# EAGLE board BothSensorBoards (EAGLE 6.6.0)
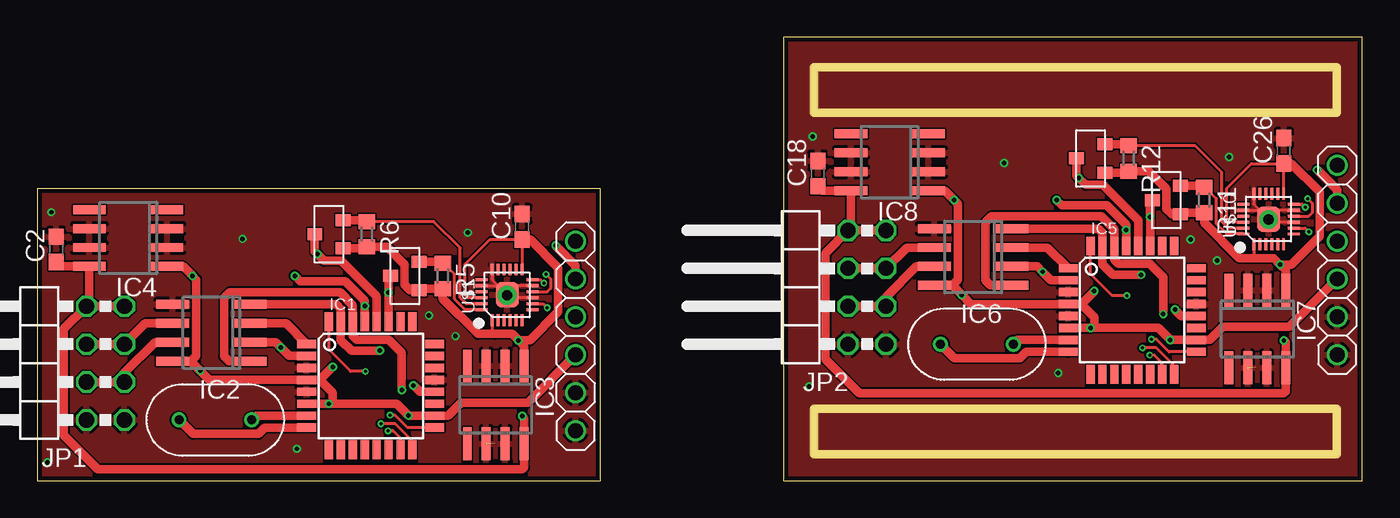
[diagram p0: board, top side]
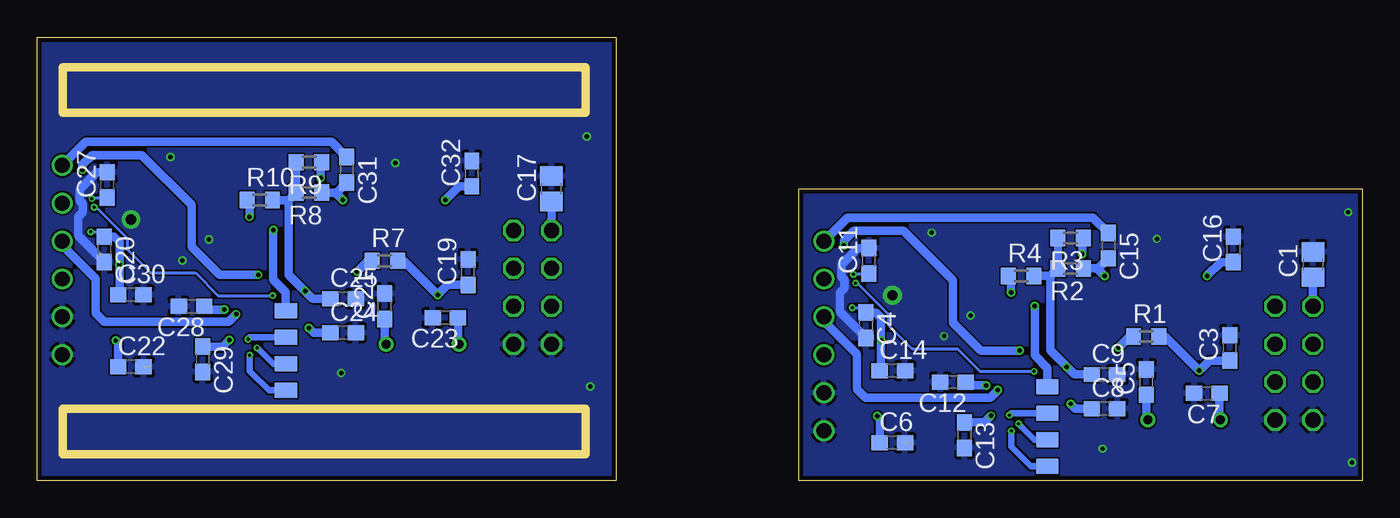
[diagram p1: board, bottom side, seen from below]

Size 88.82 x 29.71 mm. Coordinates in mm from the lower left corner, seen from the top.
Outline: 0,0 37.77,0 37.77,19.55 0,19.55 0,0
Outline: 50.04,0 88.82,0 88.82,29.71 50.04,29.71 50.04,0
Copper layers (1*16): Top 0.035mm / dielectric 1.5mm / Bottom 0.035mm
Design rules "PCB-POOL HighSpec": minimum track width 0.125mm, minimum drill 0.2mm, track to track 0.125mm, track to pad 0.125mm, pad to pad 0.125mm, via to via 0.125mm, smd to smd 0.125mm, copper to edge 0.3mm, drill to drill 0.2mm, minimum pad ring 0.2mm, minimum via ring 0.125mm, stop-mask expansion 0.075mm, vias tented up to drill 0mil, thermal gap 0.2mm
Milling: area 52.1,24.6 to 87.1,27.7; area 52.1,1.8 to 87.1,4.8

## Footprints (pad centres in the part's own frame; a part is rotated, then mirrored left to right if it is on the bottom)
C0805 = smd 1.3 x 1.5: 1 -0.85,0; 2 0.85,0
C0603 = smd 1.1 x 1: 1 -0.85,0; 2 0.85,0
TQFP32-08 = smd 1.27 x 0.559: 1 -4.293,2.8; 2 -4.293,2; 3 -4.293,1.2; 4 -4.293,0.4; 5 -4.293,-0.4; 6 -4.293,-1.2; 7 -4.293,-2; 8 -4.293,-2.8; 17 4.293,-2.8; 18 4.293,-2; 19 4.293,-1.2; 20 4.293,-0.4; 21 4.293,0.4; 22 4.293,1.2; 23 4.293,2; 24 4.293,2.8 | smd 0.559 x 1.27: 9 -2.8,-4.293; 10 -2,-4.293; 11 -1.2,-4.293; 12 -0.4,-4.293; 13 0.4,-4.293; 14 1.2,-4.293; 15 2,-4.293; 16 2.8,-4.293; 25 2.8,4.293; 26 2,4.293; 27 1.2,4.293; 28 0.4,4.293; 29 -0.4,4.293; 30 -1.2,4.293; 31 -2,4.293; 32 -2.8,4.293
SO-08 = smd 0.6 x 2.2: 1 -1.905,-2.6; 2 -0.635,-2.6; 3 0.635,-2.6; 4 1.905,-2.6; 5 1.905,2.6; 6 0.635,2.6; 7 -0.635,2.6; 8 -1.905,2.6
SO08 = smd 0.6 x 2.2: 1 -1.905,-2.6; 2 -0.635,-2.6; 3 0.635,-2.6; 4 1.905,-2.6; 5 1.905,2.6; 6 0.635,2.6; 7 -0.635,2.6; 8 -1.905,2.6
2X04/90 = drill 1.016 octagon: 1 -3.81,-6.35; 2 -3.81,-3.81; 3 -1.27,-6.35; 4 -1.27,-3.81; 5 1.27,-6.35; 6 1.27,-3.81; 7 3.81,-6.35; 8 3.81,-3.81
R0603 = smd 1 x 1.1: 1 -0.85,0; 2 0.85,0
LEAD-QFN24 = smd 0.8 x 0.2: 1 -1.7,1; 2 -1.7,0.6; 3 -1.7,0.2; 4 -1.7,-0.2; 5 -1.7,-0.6; 6 -1.7,-1; 13 1.7,-1; 14 1.7,-0.6; 15 1.7,-0.2; 16 1.7,0.2; 17 1.7,0.6; 18 1.7,1 | smd 0.2 x 0.8: 7 -1,-1.7; 8 -0.6,-1.7; 9 -0.2,-1.7; 10 0.2,-1.7; 11 0.6,-1.7; 12 1,-1.7; 19 1,1.7; 20 0.6,1.7; 21 0.2,1.7; 22 -0.2,1.7; 23 -0.6,1.7; 24 -1,1.7 | smd 1.7 x 1.54: 25 0,0
SOT-23-3 = smd 0.8 x 1: P$1 -0.95,-0.95; P$2 0.95,-0.95; P$3 0,0.95
LFXTAL003240BULK = drill 0.6: P$1 -2.44,0; P$2 2.44,0
FTDI-PINHEADER = drill 1: P$1 0,-6.35; P$2 0,-3.81; P$3 0,-1.27; P$4 0,1.27; P$5 0,3.81; P$6 0,6.35
ISP_PADS = smd 1 x 1.5: P$1 0.889,-1.143; P$2 -0.889,-1.143; P$3 -2.667,-1.143; P$4 -4.445,-1.143

## Placement (x,y rotation side)
C1  10u  [C0805]  3.3,14.48 90 bottom
C2  330n  [C0603]  1.27,15.49 90 top
C3  100n  [C0603]  8.89,8.89 90 bottom
C4  10n  [C0603]  33.27,10.41 270 bottom
C5  56p  [C0603]  14.48,6.6 90 bottom
C6  330n  [C0603]  31.5,2.54 0 bottom
C7  56p  [C0603]  10.41,5.84 180 bottom
C8  100n  [C0603]  17.27,4.83 0 bottom
C9  100n  [C0603]  17.27,7.11 0 bottom
C10  100n  [C0603]  32.51,17.02 90 top
C11  100n  [C0603]  33.07,14.73 90 bottom
C12  100n  [C0603]  27.43,6.6 180 bottom
C13  100n  [C0603]  26.67,3.05 270 bottom
C14  100n  [C0603]  31.5,7.37 0 bottom
C15  100n  [C0603]  17.02,15.75 270 bottom
C16  100n  [C0603]  8.64,15.49 90 bottom
C17  10u  [C0805]  54.36,19.56 90 bottom
C18  330n  [C0603]  52.32,20.57 90 top
C19  100n  [C0603]  59.94,13.97 90 bottom
C20  10n  [C0603]  84.33,15.49 270 bottom
C21  56p  [C0603]  65.53,11.68 90 bottom
C22  330n  [C0603]  82.55,7.62 0 bottom
C23  56p  [C0603]  61.47,10.92 180 bottom
C24  100n  [C0603]  68.33,9.91 0 bottom
C25  100n  [C0603]  68.33,12.19 0 bottom
C26  100n  [C0603]  83.57,22.1 90 top
C27  100n  [C0603]  84.12,19.81 90 bottom
C28  100n  [C0603]  78.49,11.68 180 bottom
C29  100n  [C0603]  77.72,8.13 270 bottom
C30  100n  [C0603]  82.55,12.45 0 bottom
C31  100n  [C0603]  68.07,20.83 270 bottom
C32  100n  [C0603]  59.69,20.57 90 bottom
IC1  MEGA8-AI  [TQFP32-08]  22.35,6.35 0 top
IC2  SN65176D  [SO-08]  11.68,9.91 90 top
IC3  LM2936M-3.3  [SO08]  30.73,5.08 180 top
IC4  LM2936M-5.0  [SO08]  6.1,16.26 90 top
IC5  MEGA8-AI  [TQFP32-08]  73.41,11.43 0 top
IC6  SN65176D  [SO-08]  62.74,14.99 90 top
IC7  LM2936M-3.3  [SO08]  81.79,10.16 180 top
IC8  LM2936M-5.0  [SO08]  57.15,21.34 90 top
JP1  [2X04/90]  -0.51,7.87 90 top
JP2  [2X04/90]  50.55,12.95 90 top
R1  10k  [R0603]  14.48,9.65 0 bottom
R2  10k  [R0603]  19.56,14.22 180 bottom
R3  10k  [R0603]  19.56,16.26 180 bottom
R4  10k  [R0603]  22.86,13.72 0 bottom
R5  10k  [R0603]  27.18,13.72 270 top
R6  10k  [R0603]  22.1,16.51 270 top
R7  10k  [R0603]  65.53,14.73 0 bottom
R8  10k  [R0603]  70.61,19.3 180 bottom
R9  10k  [R0603]  70.61,21.34 180 bottom
R10  10k  [R0603]  73.91,18.8 0 bottom
R11  10k  [R0603]  78.23,18.8 270 top
R12  10k  [R0603]  73.15,21.59 270 top
U$1  MPU-9250  [LEAD-QFN24]  31.5,12.45 90 top
U$2  2N7002E  [SOT-23-3]  19.56,16.51 90 top
U$3  2N7002E  [SOT-23-3]  24.64,13.72 90 top
U$4  LFXTAL003240BULK  [LFXTAL003240BULK]  11.94,4.06 180 top
U$5  FTDI-PINHEADER  [FTDI-PINHEADER]  36.09,9.7 0 top
U$6  ISP_PADS  [ISP_PADS]  19.96,1.85 270 bottom
U$7  2N7002E  [SOT-23-3]  70.61,21.59 90 top
U$8  2N7002E  [SOT-23-3]  75.69,18.8 90 top
U$9  LFXTAL003240BULK  [LFXTAL003240BULK]  62.99,9.14 180 top
U$10  MPU-9250  [LEAD-QFN24]  82.55,17.53 90 top
U$11  FTDI-PINHEADER  [FTDI-PINHEADER]  87.15,14.78 0 top
U$12  ISP_PADS  [ISP_PADS]  71.02,6.93 270 bottom

## Library data of the parts
C1-C32 R1-R12 = resistor
IC1 IC5 = atmel; MPN: ATMEGA8-16AU; OC_FARNELL: 9171371; OC_NEWARK: 73M8863
IC2 IC6 = texas; MF: TEXAS INSTRUMENTS; MPN: SN65176BD; OC_FARNELL: 9589970; OC_NEWARK: 08F5891
IC3 IC7 = national-semiconductor; MF: NATIONAL SEMICONDUCTOR; MPN: LM2936M-3.3/NOPB; OC_FARNELL: 1469059; OC_NEWARK: 41K4514
IC4 IC8 = national-semiconductor; MF: NATIONAL SEMICONDUCTOR; MPN: LM2936M-5.0/NOPB; OC_FARNELL: 9494421; OC_NEWARK: 41K4515
JP1 JP2 = pinhead
U$1 U$10 = invensense
U$2 U$3 U$7 U$8 = 2N7002E
U$4 U$9 = LFXTAL003240Bulk
U$5 U$11 = FTDI-PINHEADER
U$6 U$12 = ISP_Pads

## Nets
+3V1: C20.1 C26.1 C30.1 IC7.1 R11.2 R12.2 U$7.P$1 U$8.P$1 U$10.1 U$10.8 U$10.13 U$10.22
+3V3: C4.1 C10.1 C14.1 IC3.1 R5.2 R6.2 U$1.1 U$1.8 U$1.13 U$1.22 U$2.P$1 U$3.P$1
+5V: C3.1 C8.1 C9.1 C13.1 C16.1 IC1.4 IC1.6 IC1.18 IC2.8 IC4.1 R1.2 R2.2 R3.2 R4.2 U$5.P$3
+5V1: C19.1 C24.1 C25.1 C29.1 C32.1 IC5.4 IC5.6 IC5.18 IC6.8 IC8.1 R7.2 R8.2 R9.2 R10.2 U$11.P$3
-RE: IC1.2 IC2.2 R1.1
-RE1: IC5.2 IC6.2 R7.1
/RESET: C15.2 IC1.29 R2.1 U$6.P$4
/RESET1: C31.2 IC5.29 R8.1 U$12.P$4
DE: IC1.1 IC2.3
DE1: IC5.1 IC6.3
DTR: C15.1 U$5.P$6
DTR1: C31.1 U$11.P$6
GND: C1.2 C2.2 C3.2 C4.2 C5.2 C6.2 C7.2 C8.2 C9.2 C10.2 C11.2 C12.2 C13.2 C14.2 C16.2 IC1.3 IC1.5 IC1.21 IC2.5 IC3.2 IC3.3 IC3.6 IC3.7 IC4.2 IC4.3 IC4.6 IC4.7 JP1.1 JP1.2 U$1.9 U$1.11 U$1.18 U$1.20 U$1.25 U$5.P$1 U$5.P$2
GND1: C17.2 C18.2 C19.2 C20.2 C21.2 C22.2 C23.2 C24.2 C25.2 C26.2 C27.2 C28.2 C29.2 C30.2 C32.2 IC5.3 IC5.5 IC5.21 IC6.5 IC7.2 IC7.3 IC7.6 IC7.7 IC8.2 IC8.3 IC8.6 IC8.7 JP2.1 JP2.2 U$10.9 U$10.11 U$10.18 U$10.20 U$10.25 U$11.P$1 U$11.P$2
INT: IC1.32 U$1.12
INT1: IC5.32 U$10.12
MISO: IC1.16 U$6.P$2
MISO1: IC5.16 U$12.P$2
MOSI: IC1.15 U$6.P$1
MOSI1: IC5.15 U$12.P$1
N$1: IC2.6 JP1.5 JP1.6
N$2: IC2.7 JP1.3 JP1.4
N$3: R6.1 U$1.23 U$2.P$2
N$4: C11.1 U$1.10
N$5: C5.1 IC1.7 U$4.P$1
N$6: R5.1 U$1.24 U$3.P$2
N$7: C7.1 IC1.8 U$4.P$2
N$8: R12.1 U$7.P$2 U$10.23
N$9: C12.1 IC1.20
N$10: R11.1 U$8.P$2 U$10.24
N$11: C27.1 U$10.10
N$12: C21.1 IC5.7 U$9.P$1
N$13: C23.1 IC5.8 U$9.P$2
N$14: C28.1 IC5.20
N$15: IC6.6 JP2.5 JP2.6
N$16: IC6.7 JP2.3 JP2.4
RX: IC1.30 IC2.1 U$5.P$4
RX1: IC5.30 IC6.1 U$11.P$4
SCK: IC1.17 U$6.P$3
SCK1: IC5.17 U$12.P$3
SCL: IC1.28 R3.1 U$2.P$3
SCL1: IC5.28 R9.1 U$7.P$3
SDA: IC1.27 R4.1 U$3.P$3
SDA1: IC5.27 R10.1 U$8.P$3
TX: IC1.31 IC2.4 U$5.P$5
TX1: IC5.31 IC6.4 U$11.P$5
VCC: C1.1 C2.1 C6.1 IC3.8 IC4.8 JP1.7 JP1.8
VCC1: C17.1 C18.1 C22.1 IC7.8 IC8.8 JP2.7 JP2.8

## Tracks (layer width: path | path; a pad name or v marks a point on that pad's centre or on a via)
+3V1  (via drill 0.2 pad 0.2, 0.3 pad 0.56)
  Top 0.2: 80.21,17.33 U$10.22 79.96,17.33 79.73,17.55 79.73,19.58 81.39,21.25 C26.1 83.55,21.23 U$10.13 | U$10.8 84.98,16.93 v85.24,16.66 | U$10.1 81.55,15.07 81.71,14.91
  Top 0.559: U$7.P$1 73.05,20.64 R12.2 74.51,20.74 75.69,19.56 75.69,18.2 76.05,17.85 U$8.P$1 76.74,17.95 R11.2 78.23,17.27 80.59,14.91 81.71,14.91 82.88,14.91 v83.31,14.48 | v83.31,14.48 83.69,14.1 IC7.1 | v83.31,14.48 84.07,14.48 85.98,16.38 85.98,19.36 84.09,21.25 C26.1
  Bottom 0.2: v85.24,16.66 84.65,16.66 C20.1
  Bottom 0.559: C30.1 83.31,12.53 v83.31,14.48 83.31,16 83.65,16.34 C20.1
+3V3  (via drill 0.2 pad 0.2, 0.3 pad 0.56)
  Top 0.2: 29.16,12.25 U$1.22 28.9,12.25 28.68,12.47 28.68,14.5 30.34,16.17 C10.1 32.5,16.15 U$1.13 | U$1.8 33.92,11.85 v34.19,11.58 | U$1.1 30.5,9.99 30.66,9.83
  Top 0.559: U$2.P$1 22,15.56 R6.2 23.46,15.66 24.64,14.48 24.64,13.12 24.99,12.77 U$3.P$1 25.69,12.87 R5.2 27.18,12.19 29.54,9.83 30.66,9.83 31.83,9.83 v32.26,9.4 | v32.26,9.4 32.64,9.02 IC3.1 | v32.26,9.4 33.02,9.4 34.92,11.3 34.92,14.28 33.03,16.17 C10.1
  Bottom 0.2: v34.19,11.58 33.59,11.58 C4.1
  Bottom 0.559: C14.1 32.26,7.45 v32.26,9.4 32.26,10.92 32.6,11.26 C4.1
+5V  (via drill 0.3 pad 0.56)
  Top 0.559: 10.29,8 v10.92,7.37 11.54,6.75 IC1.4 18.94,6.75 | 18.94,6.75 v19.81,7.62 | 18.94,6.75 19.81,5.88 19.81,5.33 19.63,5.15 IC1.6 v19.56,5.15 24.09,5.15 v24.89,4.35 IC1.18 27.54,4.35 28.42,5.23 32.89,5.23 U$5.P$3 | 10.29,8 10.67,8.38 10.67,13.46 v10.41,13.72 9.78,14.35 IC4.1 | 10.29,8 IC2.8
  Bottom 0.559: R4.2 20.92,13.72 | 20.92,13.72 R2.2 R3.2 | 20.92,13.72 20.92,8.72 v19.81,7.62 19.3,7.11 C9.1 | C3.1 10.25,8.04 v10.92,7.37 13.21,9.65 R1.2 | C8.1 19.23,4.83 v19.56,5.15 | C13.1 25.34,3.9 v24.89,4.35 | C16.1 9.49,14.64 v10.41,13.72
+5V1  (via drill 0.3 pad 0.56)
  Top 0.559: 61.34,13.08 v61.98,12.45 62.59,11.83 IC5.4 70,11.83 | 70,11.83 v70.87,12.7 | 70,11.83 70.87,10.96 70.87,10.41 70.68,10.23 IC5.6 v70.61,10.23 75.15,10.23 v75.95,9.43 IC5.18 78.59,9.43 79.48,10.31 83.95,10.31 U$11.P$3 | 61.34,13.08 61.72,13.46 61.72,18.54 v61.47,18.8 60.83,19.43 IC8.1 | 61.34,13.08 IC6.8
  Bottom 0.559: R10.2 71.97,18.8 | 71.97,18.8 R8.2 R9.2 | 71.97,18.8 71.97,13.8 v70.87,12.7 70.36,12.19 C25.1 | C19.1 61.3,13.12 v61.98,12.45 64.26,14.73 R7.2 | C24.1 70.29,9.91 v70.61,10.23 | C29.1 76.4,8.98 v75.95,9.43 | C32.1 60.54,19.72 v61.47,18.8
-RE  (via drill 0.3 pad 0.56)
  Top 0.559: IC2.2 15.98,9.27 v16.33,8.91 16.9,8.35 IC1.2
  Bottom 0.559: R1.1 15.6,9.65 v16.33,8.91
-RE1  (via drill 0.3 pad 0.56)
  Top 0.559: IC6.2 67.03,14.35 v67.39,14 67.95,13.43 IC5.2
  Bottom 0.559: R7.1 66.65,14.73 v67.39,14
/RESET  (via drill 0.3 pad 0.56)
  Top 0.559: IC1.29 v21.95,11.71 21.95,12.06 20.65,13.36 17.63,13.36 v17.27,13.72
  Bottom 0.559: R2.1 17.78,14.22 | 17.78,14.22 17.69,14.22 C15.2 | v17.27,13.72 17.78,14.22 | U$6.P$4 21.11,7.54 21.95,8.39 v21.95,11.71
/RESET1  (via drill 0.3 pad 0.56)
  Top 0.559: IC5.29 v73.01,16.79 73.01,17.14 71.7,18.44 68.68,18.44 v68.33,18.8
  Bottom 0.559: R8.1 68.83,19.3 | 68.83,19.3 68.75,19.3 C31.2 | v68.33,18.8 68.83,19.3 | U$12.P$4 72.16,12.62 73.01,13.47 v73.01,16.79
DE
  Top 0.559: IC2.3 16.67,10.54 IC1.1
DE1
  Top 0.559: IC6.3 67.72,15.62 IC5.1
DTR
  Bottom 0.559: C15.1 18.05,17.63 34.52,17.63 U$5.P$6
DTR1
  Bottom 0.559: C31.1 69.1,22.71 85.57,22.71 U$11.P$6
GND  (via drill 0.3 pad 0.56, 0.7 pad 0.2)  (1 unrouted)
  Top 0.2: U$1.18 30.5,13.45 U$1.25 | U$1.20 30.9,13.05 U$1.25 | U$1.11 32.1,13.05 U$1.25 | U$1.9 31.7,12.25 U$1.25
  Bottom 0.559: C4.2 35.03,11.33 35.03,12.6 34.72,12.9 34.72,13.46 34.92,13.66 34.92,14.45 33.8,15.58 C11.2
  other vias: 28.04,9.68 26.26,11.07 17.4,2.13 13.77,16.21 28.85,16.61 0.69,1.22 0.94,17.98 31.5,12.42
  pour Bottom: 39.62,-1.27 -2.29,-1.27 -2.29,20.32 39.62,20.32
  pour Top: -3.56,21.59 -3.56,-2.54 40.89,-2.54 40.89,21.59
GND1  (via drill 0.3 pad 0.56, 0.7 pad 0.2)  (1 unrouted)
  Top 0.2: U$10.18 81.55,18.53 U$10.25 | U$10.20 81.95,18.13 U$10.25 | U$10.11 83.15,18.13 U$10.25 | U$10.9 82.75,17.33 U$10.25
  Bottom 0.559: C20.2 86.08,16.41 86.08,17.68 85.78,17.98 85.78,18.54 85.98,18.75 85.98,19.53 84.85,20.66 C27.2
  other vias: 79.1,14.76 77.32,16.15 68.45,7.21 64.82,21.29 79.91,21.69 51.74,6.3 51.99,23.06 82.55,17.5
  pour Bottom: 90.68,-1.02 48.77,-1.02 48.77,30.99 90.68,30.99
  pour Top: 47.5,32.26 47.5,-2.29 91.95,-2.29 91.95,32.26
INT  (via drill 0.2 pad 0.2)
  Top 0.2: v22,7.32 21.01,7.32 19.55,8.77 IC1.32 | U$1.12 33.75,13.45 v33.96,13.23
  Bottom 0.2: v22,7.32 25.63,7.32 27.15,8.84 30.18,8.84 31.75,10.41 31.75,11.15 33.83,13.23 v33.96,13.23
INT1  (via drill 0.2 pad 0.2)
  Top 0.2: v73.05,12.39 72.06,12.39 70.61,13.85 IC5.32 | U$10.12 84.8,18.53 v85.01,18.31
  Bottom 0.2: v73.05,12.39 76.68,12.39 78.21,13.92 81.23,13.92 82.8,15.49 82.8,16.23 84.89,18.31 v85.01,18.31
MISO  (via drill 0.2 pad 0.2)
  Top 0.2: IC1.16 25.15,2.64 23.98,3.81 v23.04,3.81
  Bottom 0.45: v23.04,3.81 21.97,2.74 U$6.P$2
MISO1  (via drill 0.2 pad 0.2)
  Top 0.2: IC5.16 76.21,7.72 75.03,8.89 v74.09,8.89
  Bottom 0.45: v74.09,8.89 73.02,7.82 U$12.P$2
MOSI  (via drill 0.2 pad 0.2)
  Top 0.2: IC1.15 24.35,2.83 23.85,3.33 v23.52,3.33
  Bottom 0.45: v23.52,3.33 23.52,2.26 22.23,0.96 U$6.P$1
MOSI1  (via drill 0.2 pad 0.2)
  Top 0.2: IC5.15 75.41,7.91 74.91,8.41 v74.57,8.41
  Bottom 0.45: v74.57,8.41 74.57,7.34 73.28,6.04 U$12.P$1
N$1
  Top 0.559: JP1.6 JP1.5 7.24,10.54 IC2.6
N$2
  Top 0.559: JP1.4 JP1.3 5.84,7.21 7.9,9.27 IC2.7
N$3
  Top 0.2: U$1.23 28.77,11.85 28.35,12.27 28.35,15.6 26.58,17.36 R6.1
  Top 0.559: U$2.P$2 22,17.46 R6.1
N$4  (via drill 0.2 pad 0.2)
  Top 0.2: U$1.10 34.19,12.65 34.42,12.88 34.42,13.51 v34.11,13.82
  Bottom 0.2: C11.1 33.31,13.84 34.09,13.84 v34.11,13.82
N$5
  Top 0.559: IC1.7 14.66,4.35 U$4.P$1
  Bottom 0.559: C5.1 14.48,4.16 U$4.P$1
N$6
  Top 0.2: U$1.24 28.69,11.45 27.99,12.14 27.99,13.82 R5.1
  Top 0.559: U$3.P$2 27.08,14.67 R5.1
N$7
  Top 0.559: IC1.8 15.26,3.55 14.83,3.12 10.44,3.12 U$4.P$2
  Bottom 0.559: C7.1 9.56,4.13 U$4.P$2
N$8
  Top 0.2: U$10.23 79.82,16.93 79.4,17.35 79.4,20.68 77.64,22.44 R12.1
  Top 0.559: U$7.P$2 73.05,22.54 R12.1
N$9  (via drill 0.3 pad 0.56)
  Top 0.559: IC1.20 25.65,5.95 v25.22,6.37
  Bottom 0.559: v25.22,6.37 26.56,6.37 C12.1
N$10
  Top 0.2: U$10.24 79.74,16.53 79.05,17.22 79.05,18.9 R11.1
  Top 0.559: U$8.P$2 78.13,19.75 R11.1
N$11  (via drill 0.2 pad 0.2)
  Top 0.2: U$10.10 85.24,17.73 85.47,17.96 85.47,18.59 v85.17,18.9
  Bottom 0.2: C27.1 84.37,18.92 85.14,18.92 v85.17,18.9
N$12
  Top 0.559: IC5.7 65.72,9.43 U$9.P$1
  Bottom 0.559: C21.1 65.53,9.24 U$9.P$1
N$13
  Top 0.559: IC5.8 66.31,8.63 65.89,8.2 61.49,8.2 U$9.P$2
  Bottom 0.559: C23.1 60.62,9.21 U$9.P$2
N$14  (via drill 0.3 pad 0.56)
  Top 0.559: IC5.20 76.7,11.03 v76.28,11.46
  Bottom 0.559: v76.28,11.46 77.61,11.46 C28.1
N$15
  Top 0.559: JP2.6 JP2.5 58.29,15.62 IC6.6
N$16
  Top 0.559: JP2.4 JP2.3 56.9,12.29 58.95,14.35 IC6.7
RX  (via drill 0.3 pad 0.56)
  Top 0.559: IC2.1 12.85,8 12.52,8.33 12.52,12.24 12.9,12.62 20.29,12.62 21.15,11.77 IC1.30 21.15,9.71 21.41,9.45 23.55,9.45 24.43,8.56 v24.43,6.07
  Bottom 0.559: v24.43,6.07 24.94,5.56 33.3,5.56 33.86,6.12 33.86,8.46 36.09,10.69 U$5.P$4
RX1  (via drill 0.3 pad 0.56)
  Top 0.559: IC6.1 63.91,13.08 63.58,13.41 63.58,17.32 63.96,17.7 71.35,17.7 72.21,16.85 IC5.30 72.21,14.79 72.47,14.53 74.6,14.53 75.49,13.64 v75.49,11.15
  Bottom 0.559: v75.49,11.15 76,10.64 84.35,10.64 84.91,11.2 84.91,13.54 87.15,15.77 U$11.P$4
SCK  (via drill 0.2 pad 0.2)
  Top 0.2: IC1.17 24.82,3.55 23.98,4.39 v23.65,4.39
  Bottom 0.45: v23.65,4.39 23.52,4.52 U$6.P$3
SCK1  (via drill 0.2 pad 0.2)
  Top 0.2: IC5.17 75.88,8.63 75.03,9.47 v74.7,9.47
  Bottom 0.45: v74.7,9.47 74.57,9.6 U$12.P$3
SCL  (via drill 0.3 pad 0.56)
  Top 0.559: IC1.28 22.75,12.35 20.37,14.73 19.23,14.73 v18.77,15.19 18.61,15.35 U$2.P$3
  Bottom 0.559: v18.77,15.19 18.77,16.19 R3.1
SCL1  (via drill 0.3 pad 0.56)
  Top 0.559: IC5.28 73.81,17.43 71.42,19.81 70.28,19.81 v69.83,20.27 69.66,20.43 U$7.P$3
  Bottom 0.559: v69.83,20.27 69.83,21.27 R9.1
SDA  (via drill 0.3 pad 0.56)
  Top 0.559: IC1.27 23.55,13.58 U$3.P$3 23.55,13.57 v23.55,12.6
  Bottom 0.559: v23.55,12.6 23.55,13.55 R4.1
SDA1  (via drill 0.3 pad 0.56)
  Top 0.559: IC5.27 74.61,18.66 U$8.P$3 74.6,18.65 v74.6,17.68
  Bottom 0.559: v74.6,17.68 74.6,18.63 R10.1
TX  (via drill 0.3 pad 0.56)
  Top 0.559: IC2.4 20.07,11.81 20.35,11.53 IC1.31 20.35,9.42 21.06,8.71 v22.96,8.71 | U$5.P$5 36.09,14.4 v34.75,15.75
  Bottom 0.559: v34.75,15.75 34.75,16.08 34.09,16.74 30.76,16.74 27.43,13.41 27.43,10.59 25.55,8.71 v22.96,8.71
TX1  (via drill 0.3 pad 0.56)
  Top 0.559: IC6.4 71.12,16.89 71.41,16.61 IC5.31 71.41,14.5 72.11,13.79 v74.02,13.79 | U$11.P$5 87.15,19.48 v85.8,20.83
  Bottom 0.559: v85.8,20.83 85.8,21.16 85.14,21.82 81.81,21.82 78.49,18.49 78.49,15.67 76.61,13.79 v74.02,13.79
VCC  (via drill 0.3 pad 0.56)
  Top 0.559: v32.51,4.32 32.64,4.19 IC3.8 32.64,0.89 32.51,0.76 4.06,0.76 1.78,3.05 1.78,10.16 JP1.8 | JP1.8 3.5,11.88 IC4.8 1.56,14.35 C2.1 | JP1.7 JP1.8
  Bottom 0.559: C6.1 32.35,4.15 v32.51,4.32 | C1.1 JP1.8
VCC1  (via drill 0.3 pad 0.56)
  Top 0.559: v83.57,9.4 83.69,9.27 IC7.8 83.69,5.97 83.57,5.84 55.12,5.84 52.83,8.13 52.83,15.24 JP2.8 | JP2.8 54.55,16.96 IC8.8 52.62,19.43 C18.1 | JP2.7 JP2.8
  Bottom 0.559: C22.1 83.4,9.23 v83.57,9.4 | C17.1 JP2.8